# Altium PCB PCB.PcbDoc (part 2 of 2)
Units mm, origin at the board's own origin, x right, y up, seen from the top; angles counter-clockwise.
Board outline 239.14 x 129.03 mm, 3 copper layers (Top Layer, Mid-Layer 1, Bottom Layer); 117 components, 73 nets, 374 pads, 650 vias.
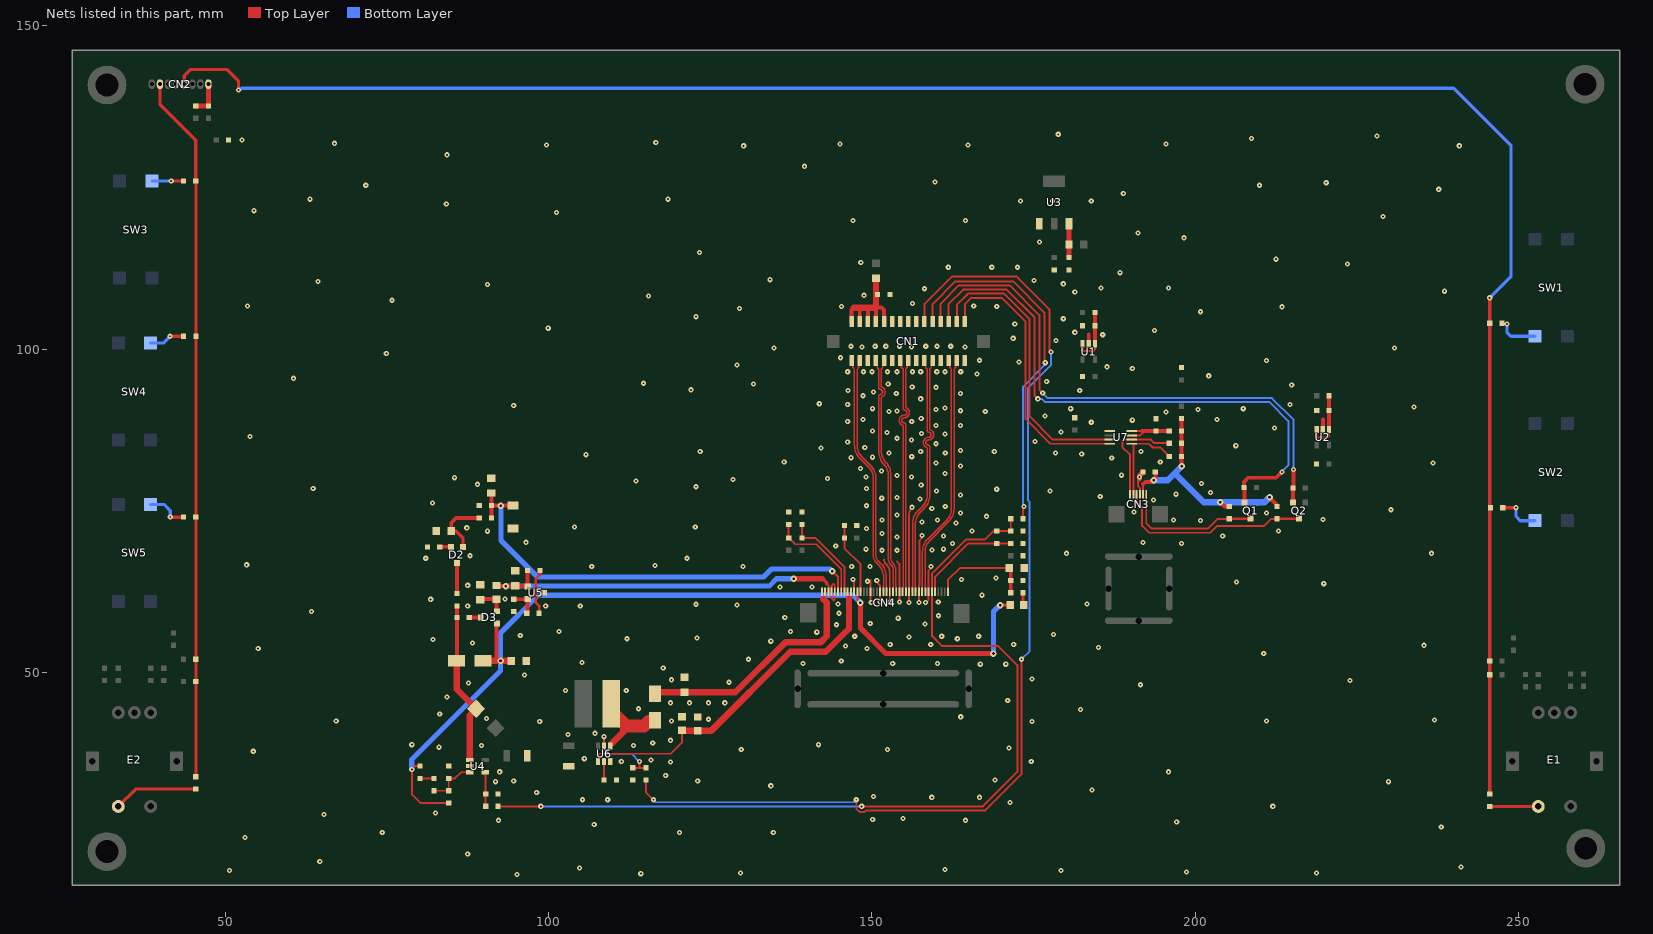
[diagram p2: the nets of this part, all layers, seen from the top]

## Via types
v1: diameter 0.8, hole 0.3, Top Layer to Bottom Layer, tented both sides, 610 vias
v2: diameter 1, hole 0.4, Top Layer to Bottom Layer, tented both sides, 40 vias

## Nets (pads, with @x,y where several pads share a name; then routed paths per layer and width w, separated by ;. In a path a pad name is that pad's centre, name@x,y a point inside that pad or via, vN(x,y) a via of type N, cw(c..) or ccw(c..) an arc to the next point about the centre after c; other vN are vias at no path point) (continued)
GND: C2.2 C3.2 C4.2 C6.2 C7.2 C8.1 C9.2 C10.2 C14.1 C16.1 C22.1 C23.1 C25.1 C26.1 C27.1 C28.1 C29.1 C30.1 C31.2 C32.1 C33.1 C34.1 C35.1 C36.2 C37.1 CN1.1 CN1.7 CN1.13 CN1.14 CN1.16 CN1.18 CN1.19 CN1.20 CN1.25 CN3.3 CN4.7 CN4.10 CN4.13 CN4.16 CN4.19 CN4.22 CN4.25 CN4.30 CN4.36 CN4.37 L6.2 R20.2 R23.1 R26.1 R29.1 R32.1 R35.1 R36.1 R37.1 R44.2 R45.2 R46.2 U1.2 U2.2 U3.1 U4.2 U5.3 U6.3 U7.1 Z1.2 | length 66.1
  Top Layer w0.3: 144.08,61.162 143.75,61.493 CN4.37@143.75,62.5 143.75,63.472 144.015,63.737 144.25,63.502 CN4.36@144.25,62.5 144.25,61.332 144.21,61.292 ; CN4.30@147.25,62.5 v1@147.25,64.389 ; 149.75,64.343 CN4.25@149.75,62.5 149.75,60.983 v1(149.9,60.833) ; v1(150.749,64.262) 150.749,63.962 151.25,63.461 CN4.22@151.25,62.5 151.25,60.918 v1(151.257,60.911) ; 151.865,67.508 ccw(c152.971,67.508) 152.189,66.726 152.3,66.615 cw(c151.214,65.529) 152.75,65.529 CN4.19@152.75,62.5 152.75,60.942 v1(152.781,60.911) ; 153.85,67.191 154.25,66.791 CN4.16@154.25,62.5 v1(154.25,60.911) ; v1(155.702,60.842) 155.75,60.89 CN4.13@155.75,62.5 155.75,74.454 cw(c157.321,74.454) v1(156.21,75.565) ; v1(157.25,60.842) CN4.10@157.25,62.5 157.25,63.373 157.334,63.457 157.334,70.418 157.75,70.834 v1(157.75,71.225) ; v1(158.295,60.833) 158.75,61.288 CN4.7@158.75,62.5 158.75,65.795 159.131,66.176 v1(159.131,66.421) ; 183.515,102.304 cw(c183.597,102.304) 183.539,102.362 ; v1@191.351,79.972 191.135,79.756 191.135,78.852 191.4,78.587 CN3.3@191.4,77.55 ; 219.696,89.12 cw(c219.744,89.12) 219.71,89.154
  Top Layer w0.6: U1.2@183.515,100.838 183.515,102.304 ; U2.2@219.696,87.565 219.696,89.12
  Top Layer w0.8: v1@191.351,79.972 v1(191.351,80.226) 191.351,80.48 C36.2@191.897,81.026
  other v1: 95.123,18.796 114.271,18.923 129.667,19.05 218.694,19.05 198.628,19.177 50.673,19.431 179.197,19.431 161.29,19.558 104.775,19.812 241.046,19.939 64.643,20.828 87.503,21.971 53.086,24.511 74.295,25.273 120.25,25.273 134.747,25.273 237.998,26.162 107.061,26.543 197.104,26.905 92.272,27.178 164.465,27.178 150.114,27.305 154.813,27.432 65.278,28.067 82.55,28.321 211.963,29.337 171.323,29.92 105.258,30.353 109.15,30.353 159.25,30.734 166.624,30.734 150.241,30.861 98.171,31.496 184.023,31.877 134.366,32.512 91.802,33.147 229.87,33.147 94.615,33.274 123.063,33.274 169.037,33.401 118.11,34.087 92.456,34.671 195.834,34.671 118.872,36.195 111.252,36.265 174.625,36.265 115.824,36.499 105.537,36.703 54.356,37.846 129.794,38.1 152.4,38.1 171.196,38.354 83.058,38.481 89.643,38.735 113.157,38.735 78.867,38.862 141.732,38.862 116.116,39.116 118.872,39.542 102.997,40.419 107.188,40.628 98.632,42.454 174.752,42.454 67.183,42.545 118.999,42.545 211.01,42.545 236.982,42.672 124.714,42.799 90.407,42.926 163.724,43.18 83.185,43.595 182.245,44.296 113.919,44.426 118.872,45.339 121.793,45.339 124.714,45.339 127.254,45.339 170.991,45.72 84.328,46.228 102.616,47.244 112.014,47.244 191.516,48.133 87.63,48.387 127.889,48.514 223.901,48.768 119.009,48.895 174.752,49.022 96.264,49.657 117.729,50.704 166.751,51.308 170.688,51.308 139.319,51.435 153.2,51.435 160.147,51.435 105.156,51.562 145.25,51.816 130.937,52.07 210.566,52.959 55.118,53.721 149.25,53.721 185.039,53.871 145.923,54.102 235.331,54.229 152.816,54.356 159.091,54.356 171.909,54.356 88.265,54.61 134.366,54.864 82.169,55.118 112.141,55.245 163.195,55.245 122.936,55.372 155.75,55.499 147.34,55.626 160.782,55.626 166.497,55.626 95.631,55.753 178.054,55.893 141.478,56.261 137.414,56.371 101.6,56.388 144.526,57.404 158.195,57.5 149.733,57.597 154.051,58.42 136.53,58.547 160.274,58.801 144.907,59.182 63.373,59.436 99.568,60.295 87.503,60.325 104.902,60.325 129.159,60.452 122.809,60.579 144.75,60.635 183.261,60.635 160.25,60.911 81.788,61.341 93.265,61.407 167.005,61.976 135.763,63.246 140.716,63.246 87.503,63.5 219.837,63.754 206.375,64.008 149.3,64.135 147.066,64.389 163.828,64.389 169.188,64.643 106.68,66.399 130.048,66.399 146.865,66.421 149.673,66.421 116.459,66.567 53.34,66.675 81.026,67.691 121.412,67.691 87.884,68.072 180.086,68.453 236.474,68.453 151.575,68.923 153.85,68.923 159.258,68.984 149.098,69.088 161.036,69.088 144.399,69.596 162.433,69.977 197.866,69.977 191.9,70.104 96.52,70.155 153.864,70.993 161.041,71.12 204.216,71.11 151.575,71.534 90.551,71.866 165.481,71.882 212.824,71.882 149.155,72.266 87.37,72.39 104.013,72.517 122.682,72.517 163,73.137 157.75,73.279 200.787,73.533 151.531,73.593 160.147,73.593 196.626,73.593 219.744,73.66 167.696,74.168 153.85,74.384 163.665,74.676 211.01,74.676 190.5,74.828 230.251,75.184 159.25,75.389 161.33,75.692 149.155,75.799 82.042,76.219 193.529,76.708 157.429,76.835 151.511,76.972 153.85,77.089 185.293,77.216 163.665,77.467 196.977,77.588 202.311,77.851 159.965,78.105 177.546,78.105 169.291,78.359 63.627,78.486 149.155,78.486 122.809,78.74 157.607,78.994 89.027,79.121 200.942,79.248 113.538,79.629 128.524,79.883 143.129,80.01 85.471,80.137 149.1,80.264 156.131,80.264 153.85,80.497 188.595,80.527 161.29,80.772 151.455,81.153 148.25,81.551 163.665,81.958 159.893,82.423 236.728,82.423 136.43,82.55 194.564,82.55 187.071,83.185 146.75,83.231 150.065,83.312 156.15,83.388 105.791,83.693 182.417,83.82 152.654,83.94 161.33,83.94 178.37,83.947 123.444,84.179 157.528,84.179 191.587,84.179 168.91,84.201 163.665,84.327 142.113,84.709 148.891,84.801 206.248,85.09 159.893,85.385 146.25,85.652 175.208,85.725 156.131,85.976 153.885,86.233 53.848,86.487 161.29,86.903 157.647,86.995 152.336,87.122 179.197,87.193 150.065,87.335 212.217,87.845 159.893,88.22 163.665,88.22 183.896,88.708 146.25,88.828 156.15,88.828 190.246,89.027 148.639,89.154 203.327,89.154 157.607,89.292 176.768,89.662 195.453,90.297 152.654,90.382 167.513,90.382 153.885,90.424 163.665,90.492 159.893,90.678 200.406,90.678 150.065,90.805 180.721,90.805 207.391,90.805 161.315,90.932 233.807,91.059 94.615,91.313 146.25,91.44 214.63,91.44 141.859,91.567 157.528,92.329 148.639,92.806 153.75,93.14 163.665,93.14 150.215,93.38 146.304,93.599 182.118,93.599 122.047,93.726 159.893,94.107 156.215,94.155 214.884,94.488 131.699,94.615 152.508,94.615 114.681,94.742 177.014,94.996 60.579,95.504 202.057,95.885 166.243,96.158 146.25,96.52 148.702,96.52 149.987,96.52 152.4,96.52 153.85,96.52 156.25,96.52 157.528,96.52 160.02,96.52 161.29,96.52 163.724,96.52 190.246,97.028 186.309,97.282 129.159,97.536 172.72,98.044 211.01,98.267 166.624,98.298 145.15,98.679 74.93,99.314 134.874,100.203 230.759,100.203 148.456,100.33 156.109,100.33 164.365,100.33 146.75,100.457 150.495,100.457 152.137,100.457 154.25,100.457 158.316,100.457 160.065,100.457 162.181,100.457 178.47,101.346 171.831,101.688 185.674,102.235 181.356,102.616 193.675,102.87 99.949,103.251 172.085,103.886 179.578,104.712 122.809,105.029 200.787,105.791 129.54,106.299 213.36,106.553 145.288,106.609 169.291,106.609 53.467,106.68 165.735,106.68 156.25,107.071 75.819,107.569 115.443,108.204 148.75,108.331 181.356,108.839 238.506,108.966 158.103,109.347 185.42,109.474 195.834,109.474 90.551,109.982 179.578,110.109 64.389,110.49 175.028,110.617 134.239,110.744 188.341,111.828 161.798,112.668 168.529,112.668 172.476,112.668 223.52,113.157 148.275,113.411 212.471,113.919 123.317,114.935 175.875,116.586 198.247,117.221 191.135,117.983 147.066,119.888 164.465,119.888 228.981,120.523 101.219,121.158 54.483,121.412 84.201,122.428 172.974,122.936 177.927,122.936 183.896,122.936 63.119,123.19 118.491,123.19 188.849,124.079 237.617,124.714 71.755,125.349 209.931,125.349 220.218,125.73 159.766,125.857 139.573,128.27 84.328,130.048 130.175,131.445 240.792,131.445 99.695,131.572 164.846,131.572 145.034,131.699 195.453,131.699 66.929,131.826 116.586,131.953 52.638,132.334 208.661,132.588 228.092,132.969 178.792,133.223
GPIO2_D4_30: CN1.10 R9.2 | length 56.9
  Top Layer w0.3: CN1.10@159.365,104.267 159.365,106.974 162.881,110.49 171.831,110.49 176.657,105.664 176.657,98.028 176.768,97.917 176.784,97.933 v1(176.784,97.917) ; R9.2@173.355,73.787 173.355,75.565 v1(173.482,75.692)
  Bottom Layer w0.3: v1(173.482,75.692) 173.355,75.819 173.355,94.234 176.784,97.663 v1(176.784,97.917)
GPIO4_D2_30: CN1.8 Q2.2 R8.1 | length 86.7
  Top Layer w0.3: CN1.8@160.615,104.267 160.615,107.021 163.449,109.855 171.323,109.855 175.895,105.283 175.895,93.726 v1(176.403,93.218) ; R8.1@215.077,78.232 R8.1@215.138,78.293
  Top Layer w0.6: Q2.2@215.077,76.307 R8.1@215.077,78.232 ; R8.1@215.138,78.293 v1(215.138,81.407)
  Bottom Layer w0.3: v1(176.403,93.218) 177.165,92.456 211.836,92.456 215.138,89.154 v1(215.138,81.407)
GPIO4_D5_30: CN1.6 Q1.2 R7.1 | length 89.6
  Top Layer w0.3: CN1.6@161.865,104.267 161.865,107.001 164.084,109.22 170.815,109.22 175.133,104.902 175.133,92.837 v1(175.641,92.329) ; R7.1@207.518,78.613 R7.1@207.584,78.547
  Top Layer w0.6: R7.1@207.518,78.613 207.518,79.502 208.153,80.137 212.471,80.137 v1(213.36,81.026) ; Q1.2@207.584,76.307 R7.1@207.584,78.547
  Bottom Layer w0.3: v1(175.641,92.329) 176.276,92.329 176.784,91.821 211.455,91.821 214.376,88.9 214.376,82.042 v1(213.36,81.026)
I2C1_SCL_18: CN1.4 U7.3 | length 45.1
  Top Layer w0.3: CN1.4@163.115,104.267 163.115,106.854 164.846,108.585 170.434,108.585 174.371,104.648 174.371,89.621 177.957,86.035 U7.3@186.768,86.035
I2C1_SDA_18: CN1.2 U7.4 | length 43.7
  Top Layer w0.3: CN1.2@164.365,104.267 164.365,106.961 165.354,107.95 170.053,107.95 173.755,104.248 173.755,89.221 177.591,85.385 U7.4@186.768,85.385
KEY1: C11.1 CN2.4 R3.2 R4.2 R5.1 R6.1 | length 316.5
  Top Layer w0.3: C11.1@245.491,49.669 C11.1@245.5,49.66
  Top Layer w0.5: CN2.4@43.688,140.97 43.688,142.26 44.684,143.256 50.292,143.256 52.07,141.478 v1(52.07,140.081) ; 245.491,47.498 C11.1@245.491,49.669 R6.1@245.491,51.816 v1(245.491,107.95) ; R5.1@245.5,31.223 C11.1@245.5,49.66
  Bottom Layer w0.5: v1(52.07,140.081) 52.324,140.081 52.578,140.335 239.903,140.335 248.793,131.445 248.793,111.252 v1(245.491,107.95)
KEY2: C20.1 CN2.7 R16.1 R17.2 R18.2 R19.2 R24.1 | length 113.5
  Top Layer w0.5: CN2.7@39.938,140.97 39.938,137.862 45.466,132.334 R17.2@45.466,125.991 ; R16.1@45.5,34.036 C20.1@45.5,48.614 ; 45.5,44.296 C20.1@45.5,48.614 ; R17.2@45.5,125.991 R18.2@45.5,102 45.5,74.041 C20.1@45.5,48.614
KEYS_VDD: C12.1 CN2.1 L5.2 | length 5.3
  Top Layer w0.8: C12.1@45.466,137.601 L5.2@47.438,137.601 CN2.1@47.438,140.97
L/R: CN4.33 R41.2 R44.1 | length 14.4
  Top Layer w0.3: R44.1@139.192,72.923 R41.2@139.192,70.828 141.262,70.828 145.75,66.34 145.75,64.054 CN4.33@145.75,62.5
LCD_AVDD: C21.1 C25.2 CN4.29 D1.2 D3.1 R21.2 R30.2 | length 144.9
  Top Layer w0.3: R21.2@80.137,35.56 79.389,35.56 v1(78.867,35.038) 78.867,31.242 80.264,29.845 C21.1@84.582,29.845 ; 91.986,52.413 v2(92.583,51.816) ; CN4.29@147.75,62.5 147.75,61.292 v2(148.209,60.833)
  Top Layer w0.5: v2(169.799,60.452) R30.2@171.35,60.452 R30.2@171.45,60.452
  Top Layer w0.6: 91.986,52.413 91.986,57.401 D3.1@92.182,57.597
  Top Layer w0.8: v2(148.209,60.833) 148.209,56.896 152.146,52.959 v2(168.783,52.959)
  Top Layer w1: D1.2@89.877,51.816 v2(92.583,51.816) C25.2@94.246,51.816
  Bottom Layer w0.8: v1(78.867,35.038) 78.867,36.576 92.583,50.292 v2(92.583,51.816) 92.583,56.134 98.425,61.976 147.066,61.976 v2(148.209,60.833) ; v2(168.783,52.959) 168.783,59.436 v2(169.799,60.452)
LCD_RESET: C35.2 CN4.5 R12.1 | length 16.2
  Top Layer w0.3: CN4.5@159.75,62.5 159.75,64.814 164.913,69.977 R12.1@169.291,69.977 C35.2@171.45,69.977
LCD_STBY: C34.2 CN4.6 R9.1 R10.2 R12.2 | length 140.5
  Top Layer w0.3: R10.2@92.202,29.337 v1(98.806,29.337) ; v1(148.41,29.337) 167.146,29.337 172.466,34.657 172.466,51.181 169.545,54.102 160.893,54.102 159.25,55.745 CN4.6@159.25,62.5 159.25,65.27 164.592,70.612 167.513,70.612 168.783,71.882 R12.2@169.291,71.882 C34.2@171.45,71.882 R9.1@171.45,73.787
  Bottom Layer w0.3: v1(98.806,29.337) v1(148.41,29.337)
LCD_VCOM: C29.2 CN4.1 R31.1 R32.2 | length 16.1
  Top Layer w0.3: CN4.1@161.75,62.5 161.75,64.341 163.576,66.167 C29.2@171.45,66.167
  Top Layer w0.5: R31.1@171.45,62.357 R32.2@171.45,64.262 C29.2@171.45,66.167
LCD_VGH: C30.2 CN4.38 R28.2 R34.2 U5.1 | length 58.8
  Top Layer w0.3: U5.1@96.728,63.373 U5.1@96.774,63.419 ; 143.002,63.754 143.25,63.506 CN4.38@143.25,62.5
  Top Layer w0.5: 142.365,64.516 143.002,63.879 143.002,63.754
  Top Layer w0.6: R28.2@92.202,63.373 v2(93.408,63.373) 94.742,63.373 U5.1@96.728,63.373 ; U5.1@96.774,63.419 R34.2@96.774,65.786
  Top Layer w0.8: v2(137.922,64.516) 142.365,64.516
  Bottom Layer w0.8: v2(93.408,63.373) 134.112,63.373 135.255,64.516 v2(137.922,64.516)
LCD_VGL: C28.2 CN4.35 R27.2 R35.2 Z1.1 | length 70.2
  Top Layer w0.3: R35.2@91.186,75.819 R35.2@91.189,75.816 ; v2(143.891,65.659) 144.75,64.8 CN4.35@144.75,62.5
  Top Layer w0.6: R27.2@91.186,73.914 R35.2@91.186,75.819 C28.2@91.186,77.724 ; R35.2@91.189,75.816 Z1.1@94.361,75.816
  Bottom Layer w0.8: v2(92.647,75.819) 92.647,70.421 98.298,64.77 133.223,64.77 134.493,66.04 143.51,66.04 v2(143.891,65.659)
LED+: C32.2 CN4.39 CN4.40 D4.2 | length 38.4
  Top Layer w0.3: CN4.40@142.25,62.5 142.24,62.51 142.24,61.722 142.494,61.468 142.75,61.724 CN4.39@142.75,62.5
  Top Layer w1: D4.2@116.459,46.954 122.863,46.954 128.869,46.954 136.652,54.737 142.113,54.737 143.002,55.626 143.002,60.833 142.494,61.341
LED-: CN4.31 CN4.32 R36.2 R37.2 U6.1 | length 55.4
  Top Layer w0.3: U6.1@107.635,36.265 107.635,37.15 107.95,37.465 118.872,37.465 120.65,39.243 120.65,41.048 R36.2@120.65,41.08 ; 146.25,61.522 CN4.32@146.25,62.5 ; 146.75,61.522 CN4.31@146.75,62.5
  Top Layer w0.95: 146.431,56.769 146.431,61.341
  Top Layer w1: R36.2@120.65,41.048 R37.2@123.063,41.048 125.19,41.048 137.355,53.213 142.875,53.213 146.431,56.769
LVDS_5V0: C7.1 CN1.22 CN1.24 CN1.26 CN1.28 CN1.30 L4.2 | length 20
  Top Layer w0.3: 148.082,106.426 148.115,106.393 ; 149.352,106.426 149.365,106.413 ; 150.615,106.306 150.622,106.313 150.622,106.426
  Top Layer w0.6: CN1.30@146.865,104.267 146.865,106.098 147.193,106.426 ; CN1.28@148.115,104.267 148.115,106.393 ; CN1.26@149.365,104.267 149.365,106.413 ; CN1.24@150.615,104.267 150.615,106.306 ; 150.622,106.426 151.496,106.426 151.865,106.057 CN1.22@151.865,104.267
  Top Layer w1: 147.193,106.426 148.082,106.426 149.352,106.426 150.622,106.426 150.622,108.458 L4.2@150.622,110.984
LVDS_CH0_N: CN1.3 CN4.8 | length 37.5
  Top Layer w0.2: CN4.8@158.25,62.5 158.25,63.179 ccw(c158.079,63.179) 158.2,63.3 158.2,68.629 cw(c160.74,68.629) 158.944,70.425 161.829,73.31 ccw(c159.75,75.389) 162.69,75.389 162.69,96.892 ccw(c161.664,97.918) 163.115,97.918 CN1.3@163.115,98.267
LVDS_CH0_P: CN1.5 CN4.9 | length 37.5
  Top Layer w0.2: CN4.9@157.75,62.5 157.75,63.179 cw(c157.921,63.179) 157.8,63.3 157.8,68.7 cw(c160.569,68.7) 158.611,70.658 161.546,73.593 ccw(c159.75,75.389) 162.29,75.389 162.29,96.892 cw(c163.316,97.918) 161.865,97.918 CN1.5@161.865,98.267
LVDS_CH1_N: CN1.9 CN4.11 | length 37.9
  Top Layer w0.2: CN4.11@156.75,62.5 156.75,63.179 ccw(c156.579,63.179) 156.7,63.3 156.7,72.9 cw(c159.411,72.9) 157.494,74.817 158.079,75.402 ccw(c156,77.481) 158.94,77.481 158.94,84.976 ccw(c158.74,84.976) 158.74,85.176 cw(c158.74,85.576) 158.74,85.976 ccw(c158.74,86.776) 159.54,86.776 ccw(c158.74,86.776) 158.94,87.551 158.94,96.892 ccw(c157.914,97.918) 159.365,97.918 CN1.9@159.365,98.267
LVDS_CH1_P: CN1.11 CN4.12 | length 37.9
  Top Layer w0.2: CN4.12@156.25,62.5 156.25,63.179 cw(c156.421,63.179) 156.3,63.3 156.3,73.137 cw(c158.84,73.137) 157.044,74.933 157.796,75.685 ccw(c156,77.481) 158.54,77.481 158.54,84.801 cw(c158.74,85.576) 158.74,86.376 ccw(c158.74,86.776) 159.14,86.776 ccw(c158.74,86.776) 158.74,87.176 cw(c158.74,87.376) 158.54,87.376 158.54,96.892 cw(c159.566,97.918) 158.115,97.918 CN1.11@158.115,98.267
LVDS_CH2_N: CN1.15 CN4.14 | length 37.2
  Top Layer w0.2: CN4.14@155.25,62.5 155.25,63.179 ccw(c155.079,63.179) 155.2,63.3 155.2,88.405 ccw(c155,88.405) 155,88.605 cw(c155,89.005) 155,89.405 ccw(c155,90.205) 155.8,90.205 ccw(c155,90.205) 155.2,90.98 155.2,96.902 ccw(c154.198,97.904) 155.615,97.904 CN1.15@155.615,98.267
LVDS_CH2_P: CN1.17 CN4.15 | length 37.2
  Top Layer w0.2: CN1.17@154.365,98.267 154.365,97.932 ccw(c155.85,97.932) 154.8,96.882 154.8,90.805 ccw(c155,90.805) 155,90.605 cw(c155,90.205) 155.4,90.205 cw(c155,90.205) 155,89.805 ccw(c155,89.005) 154.8,88.23 154.8,63.3 ccw(c154.921,63.179) 154.75,63.179 CN4.15@154.75,62.5
LVDS_CH3_N: CN1.27 CN4.20 | length 37.4
  Top Layer w0.2: CN1.27@148.115,98.267 148.115,97.918 cw(c146.664,97.918) 147.69,96.892 147.69,85.184 ccw(c150.23,85.184) 148.434,83.388 149.754,82.068 cw(c147.675,79.989) 150.615,79.989 150.615,68.022 ccw(c151.581,68.022) 150.898,67.339 151.389,66.848 cw(c149.431,64.89) 152.2,64.89 152.2,63.3 cw(c152.079,63.179) 152.25,63.179 CN4.20@152.25,62.5
LVDS_CH3_P: CN1.29 CN4.21 | length 37.4
  Top Layer w0.2: CN1.29@146.865,98.267 146.865,97.918 ccw(c148.316,97.918) 147.29,96.892 147.29,85.184 ccw(c150.23,85.184) 148.151,83.105 149.471,81.785 cw(c147.675,79.989) 150.215,79.989 150.215,68.022 ccw(c151.581,68.022) 150.615,67.056 151.056,66.615 cw(c149.26,64.819) 151.8,64.819 151.8,63.3 ccw(c151.921,63.179) 151.75,63.179 CN4.21@151.75,62.5
LVDS_CLK_N: CN1.21 CN4.17 | length 37.1
  Top Layer w0.2: CN1.21@151.865,98.267 151.865,97.918 cw(c150.414,97.918) 151.44,96.892 151.44,94.155 cw(c151.24,93.38) 152.04,93.38 cw(c151.24,93.38) 151.44,92.605 151.44,84.226 ccw(c153.949,84.226) 152.175,82.452 cw(c150.405,80.682) 152.908,80.682 152.908,67.82 ccw(c154.307,67.82) 153.318,66.831 cw(c152.395,65.908) 153.7,65.908 153.7,63.3 cw(c153.579,63.179) 153.75,63.179 CN4.17@153.75,62.5
LVDS_CLK_P: CN1.23 CN4.18 | length 37.2
  Top Layer w0.2: CN1.23@150.615,98.267 150.615,97.918 ccw(c152.066,97.918) 151.04,96.892 151.04,93.98 ccw(c151.24,93.98) 151.24,93.78 cw(c151.24,93.38) 151.64,93.38 cw(c151.24,93.38) 151.24,92.98 ccw(c151.24,92.78) 151.04,92.78 151.04,84.226 ccw(c153.949,84.226) 151.892,82.169 cw(c150.405,80.682) 152.508,80.682 152.508,67.82 ccw(c154.307,67.82) 153.035,66.548 cw(c152.395,65.908) 153.3,65.908 153.3,63.3 ccw(c153.421,63.179) 153.25,63.179 CN4.18@153.25,62.5
NetC2_1: C2.1 L1.2 U3.3 | length 5.2
  Top Layer w0.3: C2.1@180.467,114.173 C2.1@180.54,114.246
  Top Layer w0.8: C2.1@180.467,114.3 U3.3@180.467,119.38
NetC3_1: C3.1 L2.2 U1.1 U1.3 | length 8.8
  Top Layer w0.3: U1.3@182.565,100.838 182.565,99.883 182.753,99.695 184.211,99.695 184.465,99.949 U1.1@184.465,100.838
  Top Layer w0.6: U1.1@184.465,100.838 L2.2@184.465,105.664
NetC4_1: C4.1 L3.2 U2.1 U2.3 | length 9.4
  Top Layer w0.3: U2.3@218.746,87.565 218.746,86.456 218.873,86.329 220.472,86.329 220.646,86.503 U2.1@220.646,87.565 U2.1@220.651,87.57
  Top Layer w0.6: U2.1@220.651,87.57 C4.1@220.651,90.52 L3.2@220.651,92.806
NetC16_2: C16.2 R10.1 U4.4 | length 5.3
  Top Layer w0.3: U4.4@90.227,34.61 90.227,29.407 R10.1@90.297,29.337
NetC18_1: C18.1 D2.3 | length 4.7
  Top Layer w0.6: C18.1@85.852,62.23 D2.3@85.852,66.949
NetC18_2: C18.2 C19.2 D1.1 L7.2 U4.1 | length 25.2
  Top Layer w0.3: U4.1@87.827,36.51 U4.1@87.827,36.76
  Top Layer w0.6: D1.1@85.852,51.943 C19.2@85.852,58.547 C18.2@85.852,60.325
  Top Layer w1: D1.1@85.8,51.689 85.8,47.442 L7.2@88.816,44.426 87.827,43.437 U4.1@87.827,36.76
NetC19_1: C19.1 D3.3 | length 1.9
  Top Layer w0.6: C19.1@87.757,58.547 D3.3@89.682,58.547
NetC21_2: C21.2 R22.1 R23.2 U4.3 | length 7.8
  Top Layer w0.3: R22.1@82.296,31.75 C21.2@84.582,31.75 R23.2@84.582,33.655 85.532,33.655 86.487,34.61 U4.3@87.827,34.61
NetC22_2: C22.2 D2.1 R27.1 | length 9.5
  Top Layer w0.5: C22.2@84.963,71.882 85.725,71.882 86.802,70.805 D2.1@86.802,69.449
  Top Layer w0.6: C22.2@84.963,71.882 84.963,73.152 85.725,73.914 R27.1@89.281,73.914
NetC23_2: C23.2 D3.2 R28.1 | length 4.4
  Top Layer w0.3: D3.2@91.948,59.731 D3.2@92.182,59.497
  Top Layer w0.6: C23.2@89.535,61.468 89.63,61.373 R28.1@91.948,61.373 D3.2@91.948,59.731
NetC27_2: C27.2 U6.2 | length 2.9
  Top Layer w0.3: C27.2@108.585,33.401 U6.2@108.585,36.265
NetC33_2: C33.2 R38.2 U7.7 U7.8 | length 7.4
  Top Layer w0.3: U7.7@190.354,86.685 191.463,86.685 191.9,87.122 ; U7.8@190.354,87.335 191.77,87.335 ; R38.2@195.92,87.335 R38.2@195.961,87.376
  Top Layer w0.6: 191.77,87.335 C33.2@193.929,87.335 R38.2@195.92,87.335
NetD2_2: D2.2 R20.1 | length 1.7
  Top Layer w0.5: R20.1@83.185,69.449 D2.2@84.902,69.449
NetD4_1: D4.1 L8.2 U6.4 | length 10.8
  Top Layer w0.3: 111.558,42.418 112.193,41.783
  Top Layer w1: U6.4@109.791,39.052 111.558,40.819 111.558,42.196 111.558,42.418
  Top Layer w2: L8.2@110.162,43.593 111.558,42.196 ; 112.193,41.783 114.772,41.783 115.443,42.454 D4.1@115.744,42.454
NetE1_5: E1.5 R5.2 | length 7.5
  Top Layer w0.5: R5.2@245.5,29.318 E1.5@253,29.318
NetE2_5: E2.5 R16.2 | length 13.1
  Top Layer w0.5: E2.5@33.5,29.318 36.186,32.004 45.405,32.004 R16.2@45.5,32.004
NetR3_1: R3.1 SW1.3 | length 5.9
  Bottom Layer w0.5: v1(248.158,103.886) 248.158,102.616 248.774,102 SW1.3@252.5,102
NetR4_1: R4.1 SW2.3 | length 6.6
  Top Layer w0.5: R4.1@247.5,75.5 v1(249.555,75.5)
  Bottom Layer w0.5: v1(249.555,75.5) 249.555,74.168 250.223,73.5 SW2.3@252.5,73.5
NetR17_1: R17.1 SW3.3 | length 4.9
  Top Layer w0.3: R17.1@43.554,125.984 R17.1@43.561,125.991
  Top Layer w0.5: v1(41.676,125.984) R17.1@43.554,125.984
  Bottom Layer w0.3: v1@41.669,125.991 v1(41.676,125.984)
  Bottom Layer w0.5: SW3.3@38.695,125.991 v1@41.669,125.991
NetR18_1: R18.1 SW4.3 | length 5.5
  Top Layer w0.5: v1(41.5,102) R18.1@43.595,102
  Bottom Layer w0.5: SW4.3@38.5,100.952 40.452,100.952 v1(41.5,102)
NetR19_1: R19.1 SW5.3 | length 6.5
  Top Layer w0.5: v1(41.529,74.041) R19.1@43.561,74.041
  Bottom Layer w0.5: SW5.3@38.5,76 40.586,76 41.529,75.057 v1(41.529,74.041)
NetR21_1: R21.1 R22.2 | length 2.2
  Top Layer w0.3: R21.1@80.137,33.655 R22.2@82.296,33.655
NetR25_1: R25.1 R26.2 U6.5 | length 12.6
  Top Layer w0.3: U6.5@108.585,38.665 v1(108.585,40.104) ; R26.2@113.03,35.292 114.046,35.292 ; v1(114.046,36.265) 114.046,35.292 ; R25.1@115.062,35.292 114.046,35.292
  Bottom Layer w0.3: v1(108.585,40.104) 108.585,38.227 109.347,37.465 112.846,37.465 v1(114.046,36.265)
NetR29_2: R29.2 R33.2 U5.2 | length 4.2
  Top Layer w0.6: R29.2@94.615,61.341 96.728,61.341 96.728,59.39 R33.2@96.647,59.309
NetR30_1: R30.1 R31.2 | length 1.9
  Top Layer w0.5: R30.1@173.355,60.452 R31.2@173.355,62.357
NetR33_1: R33.1 R34.1 | length 7
  Top Layer w0.4: R33.1@98.552,59.309 98.552,60.325 98.044,60.833 98.044,64.516 98.679,65.151 R34.1@98.679,65.786
PWM0_33: CN1.12 R25.2 | length 164.8
  Top Layer w0.3: R25.2@115.062,33.387 115.062,31.496 v1(116.205,30.353) ; v1(147.574,30.353) 147.574,28.997 148.123,28.448 148.844,28.448 149.098,28.702 167.527,28.702 173.101,34.276 v1(173.101,52.07) v1@173.101,52.197 ; CN1.12@158.115,104.267 158.115,106.934 162.433,111.252 172.339,111.252 177.419,106.172 177.419,99.822 v1(177.673,99.568)
  Bottom Layer w0.3: v1(116.205,30.353) 116.586,29.972 147.193,29.972 v1(147.574,30.353) ; v1(173.101,52.07) 174.371,53.34 174.371,76.401 174.117,76.655 174.117,93.98 177.673,97.536 v1(177.673,99.568)
SELB: CN4.28 R43.2 R46.1 | length 11.3
  Top Layer w0.3: R46.1@145.75,72.771 145.75,69.261 148.25,66.761 CN4.28@148.25,62.5
TP_IRQ_33: CN3.4 Q2.3 R14.1 | length 30.9
  Top Layer w0.3: CN3.4@190.9,77.55 190.9,76.292 191.77,75.422 191.77,72.7 192.842,71.628 202.311,71.628 203.327,72.644 210.566,72.644 211.709,73.787 R14.1@212.598,73.787
  Top Layer w0.4: R14.1@212.598,73.787 Q2.3@216.154,73.787
TP_RST_33: CN3.1 Q1.3 R13.1 | length 21.8
  Top Layer w0.3: CN3.1@192.4,77.55 192.4,73.082 193.22,72.263 201.93,72.263 203.454,73.787 R13.1@205.232,73.787
  Top Layer w0.4: R13.1@205.232,73.787 Q1.3@208.788,73.787
TP_SCL_33: CN3.6 R39.2 U7.6 | length 16
  Top Layer w0.3: U7.6@189.865,86.032 189.029,86.032 188.722,85.725 188.722,84.836 189.9,83.658 CN3.6@189.9,77.55 ; U7.6@190.168,86.035 193.111,86.035 193.675,85.471 R39.2@195.961,85.471
TP_SDA_33: CN3.5 R40.2 U7.5 | length 14.2
  Top Layer w0.3: CN3.5@190.4,77.55 U7.5@190.4,85.339 ; U7.5@190.4,85.385 192.816,85.385 193.365,84.836 194.564,84.836 R40.2@195.961,83.439
TP_VDD: C36.1 CN3.2 L9.1 R13.2 R14.2 R38.1 R39.1 R40.1 | length 38.3
  Top Layer w0.3: CN3.2@191.9,77.55 191.9,79.148
  Top Layer w0.6: 191.9,79.148 192.254,79.502 193.294,79.502 v2(193.548,79.756) 193.802,80.01 C36.1@193.802,81.026 ; v2(197.866,81.915) R40.1@197.866,83.439 R39.1@197.866,85.471 R38.1@197.866,87.376 L9.1@197.866,89.281 ; v2(203.835,76.327) 204.47,75.692 R13.2@205.232,75.692 ; v2(211.455,77.089) 212.598,75.946 R14.2@212.598,75.692
  Bottom Layer w0.3: 197.866,81.407 v2(197.866,81.915)
  Bottom Layer w1: v2(193.548,79.756) 195.707,79.756 196.786,80.835 ; v2(197.866,81.915) 196.786,80.835 ; v2(211.455,77.089) 210.693,76.327 v2(203.835,76.327) 201.295,76.327 196.786,80.835
U/D: CN4.34 R42.2 R45.1 | length 15.7
  Top Layer w0.3: R45.1@137.13,72.923 R42.2@137.13,70.828 138.108,69.85 141.351,69.85 145.25,65.951 CN4.34@145.25,62.5
pads on no net: CN1.M1 CN1.M2 CN3. CN4. CN4.4 CN4.23 CN4.24 CN4.26 CN4.27 E1.MP1 E1.MP2 E2.MP1 E2.MP2 SW1.2 SW1.4 SW2.2 SW2.4 SW3.2 SW3.4 SW4.2 SW4.4 SW5.2 SW5.4 U1.4 U2.4 U3.4

## Polygon pours and split planes (outlines as drawn)
AGND on Top Layer "NONET_L-01_P-001" (solid, remove dead copper, pour order 6): 27.051,18.034 27.051,145.415 264.795,145.415 264.795,18.034 242.697,18.034 242.697,135.128 49.022,135.128 49.022,18.034
GND on Top Layer "NONET_L-01_P-001" (solid, remove dead copper, pour order 0): 50.165,18.034 50.165,134.112 241.681,134.112 241.681,18.034
AGND on Bottom Layer "NONET_L-01_P-001" (solid, remove dead copper, pour order 8): 27.057,18.034 27.057,145.42 264.795,145.42 264.795,18.034 242.703,18.034 242.703,135.128 49.028,135.128 49.028,18.034
GND on Bottom Layer "NONET_L-01_P-001" (solid, remove dead copper, pour order 4): 50.165,134.112 50.165,18.034 241.681,18.034 241.681,134.112

## Silkscreen, mask and mechanical layers (free items; w line width, h text height)
Top Overlay:
  lines w0.254: 141.25,51 141.25,54 141.25,56.5 ; 162.25,51 162.25,56.5 ; 189,69 189,71.675 ; 193.5,69 193.5,71.675
Bottom Overlay:
  lines w0.254: 132.25,23 132.25,42.5 162.25,42.5 ; 141,42.5 141,44 ; 162.25,23 162.25,42.5 ; 162.25,44 162.25,42.5 ; 179.25,23 179.25,48 183.75,48 189.25,53.5 189.25,57 ; 193.25,57 193.25,53.5 198.75,48 203.25,48 203.25,23
  lines w0.3: 49.25,23 49.25,141 242.25,141 242.25,23 49.25,23
  text "BAND" at 40.259,128.397 h2
  text "NEXT" at 259,121.5 h2
  text "NAVI" at 39.751,103.632 h2
  text "PREVIOUS" at 263,92.5 h2
  text "HOME" at 40.005,78.232 h2
  text "VOLUME / POWER" at 263.2,49.318 h2
  text "TUNE / EQ" at 42.5,48.818 h2
Bottom Solder:
  text "TFT 1024x600 8\" CAP TOUCH" at 104.775,19.05 h2
  text "X3399-EVK-DISPLAY" at 156.718,18.923 h2
  text "PCB-1.0" at 177.927,18.923 h2
  text "Made in Ukraine O.G." at 239.903,18.796 h2
Mechanical 1:
  lines w0.254: 26.5,17.272 26.5,146.05 265.5,146.05 265.5,17.272 26.5,17.272
Mechanical 13:
  lines w0.6: 26.797,17.653 265.176,17.653 265.176,145.669 26.797,145.669 26.797,17.653

## Text inside footprints (layer, text, board x,y; h text height)
CN1: Top Overlay "2" at 163.915,106.867 h1 r270; Top Overlay "1" at 163.915,96.167 h1 r270